# EAGLE board PCB_v21 (EAGLE 9.6.2)
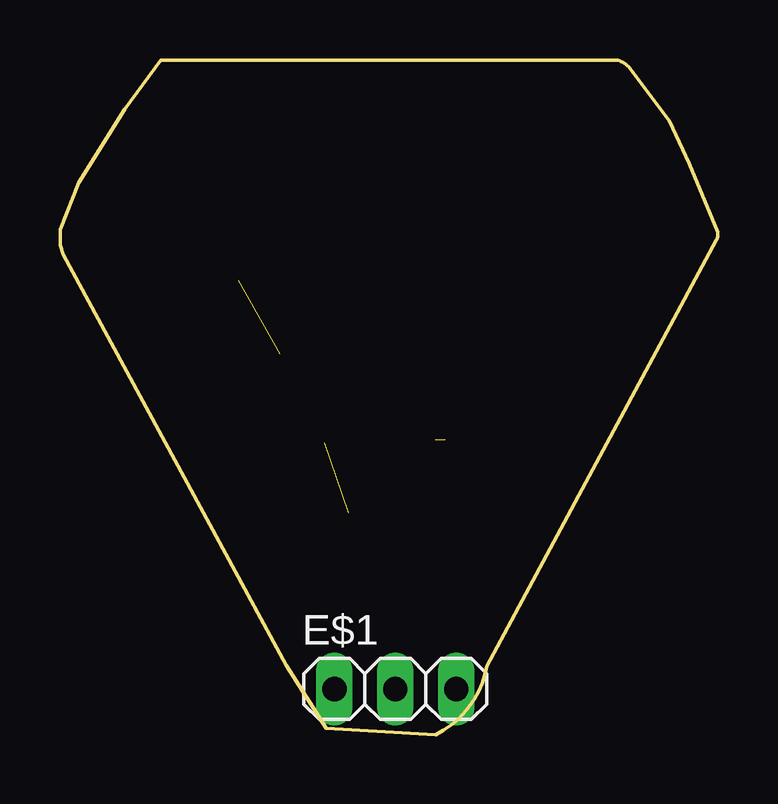
[diagram p0: board, top side]
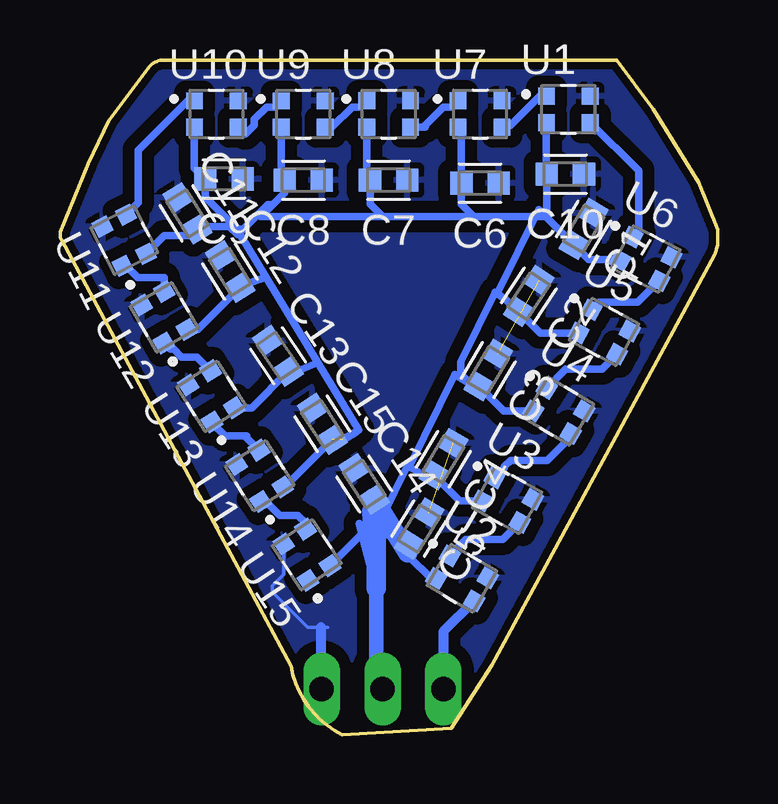
[diagram p1: board, bottom side, seen from below]

Size 27.41 x 28.13 mm. Coordinates in mm from the lower left corner, seen from the top.
Outline: 27.34,20.61 arc42 27.4,20.95 26.23,23.81 25.38,25.59 23.74,27.78 arc39 23.24,28.11 4.2,28.13 2.69,26.07 0.78,23 0,21.06 0,20.41 0.13,20.01 9.43,2.89 11.1,0.25 15.66,0 arc53 17.78,2.84 27.34,20.61
Copper layers (1*16): Top 0.035mm / dielectric 1.5mm / Bottom 0.035mm
Design rules "default *": minimum track width 6mil, minimum drill 0.35mm, track to track 20mil, track to pad 12mil, pad to pad 6mil, via to via 6mil, smd to smd 6mil, copper to edge 12mil, drill to drill 6mil, minimum pad ring 10mil, minimum via ring 8mil, stop-mask expansion 4mil, vias tented up to drill 0mil, thermal gap 10mil

## Footprints (pad centres in the part's own frame; a part is rotated, then mirrored left to right if it is on the bottom)
CAPC1608X85 = smd 0.921 x 0.97: 1 -0.775,0; 2 0.775,0
1X03 = drill 1.016 long: 1 -2.54,0; 2 0,0; 3 2.54,0
LED_WS2812-2020 = smd 0.7 x 0.7: 1 -0.915,0.55; 2 -0.915,-0.55; 3 0.915,-0.55; 4 0.915,0.55

## Placement (x,y rotation side)
C1  [CAPC1608X85]  5.59,21.08 239.1 bottom
C2  [CAPC1608X85]  7.87,18.29 236.7 bottom
C3  [CAPC1608X85]  9.56,15.2 239.2 bottom
C4  [CAPC1608X85]  11.43,11.48 239.1 bottom
C5  [CAPC1608X85]  12.45,8.58 238.4 bottom
C6  [CAPC1608X85]  9.91,22.99 180 bottom
C7  [CAPC1608X85]  13.72,23.11 180 bottom
C8  [CAPC1608X85]  17.27,23.11 180 bottom
C9  [CAPC1608X85]  20.57,23.17 180 bottom
C10  [CAPC1608X85]  6.35,23.37 180 bottom
C11  [CAPC1608X85]  22.1,21.73 301.5 bottom
C12  [CAPC1608X85]  20.32,19.3 301.9 bottom
C13  [CAPC1608X85]  18.32,15.79 304.1 bottom
C14  [CAPC1608X85]  14.73,10.45 303.3 bottom
C15  [CAPC1608X85]  16.48,12.95 302.8 bottom
E$1  [1X03]  13.97,1.9 0 top
U1  WS2812-2020  [LED_WS2812-2020]  6.23,26.07 0 bottom
U2  WS2812-2020  [LED_WS2812-2020]  10.66,6.52 329.5 bottom
U3  WS2812-2020  [LED_WS2812-2020]  8.78,9.78 330.8 bottom
U4  WS2812-2020  [LED_WS2812-2020]  6.63,13.49 329.2 bottom
U5  WS2812-2020  [LED_WS2812-2020]  4.74,16.78 331.2 bottom
U6  WS2812-2020  [LED_WS2812-2020]  3,19.83 332.5 bottom
U7  WS2812-2020  [LED_WS2812-2020]  9.91,25.88 0 bottom
U8  WS2812-2020  [LED_WS2812-2020]  13.72,25.87 0 bottom
U9  WS2812-2020  [LED_WS2812-2020]  17.27,25.87 0 bottom
U10  WS2812-2020  [LED_WS2812-2020]  20.89,25.87 0 bottom
U11  WS2812-2020  [LED_WS2812-2020]  24.73,20.61 117 bottom
U12  WS2812-2020  [LED_WS2812-2020]  23.07,17.4 120.4 bottom
U13  WS2812-2020  [LED_WS2812-2020]  21.11,14.1 122.6 bottom
U14  WS2812-2020  [LED_WS2812-2020]  19.09,10.79 122.8 bottom
U15  WS2812-2020  [LED_WS2812-2020]  17.12,7.5 123.7 bottom

## Library data of the parts
C1-C15 = Capacitor; CATEGORY: Capacitor
E$1 = pinhead
U1-U3 U5-U15 = WS2812-2020; MANUFACTURER: Worldsemi; STANDARD: Manufacturer Recommendations
U4 = WS2812-2020; MANUFACTURER: Worldsemi; SPICEPREFIX: E; STANDARD: Manufacturer Recommendations

## Nets
GND: C1.2 C2.2 C3.2 C4.2 C5.2 C6.2 C7.2 C8.2 C9.2 C10.2 C11.2 C12.2 C13.2 C14.2 C15.2 U1.2 U2.2 U3.2 U4.2 U5.2 U6.2 U7.2 U8.2 U9.2 U10.2 U11.2 U12.2 U13.2 U14.2 U15.2
N$1: U2.1 U3.3
N$2: U3.1 U4.3
N$3: U4.1 U5.3
N$4: U5.1 U6.3
N$5: U2.3
N$6: U1.1 U7.3
N$11: U7.1 U8.3
N$12: U8.1 U9.3
N$13: U9.1 U10.3
N$14: U1.3 U6.1
N$15: U11.1 U12.3
N$16: U12.1 U13.3
N$17: U13.1 U14.3
N$18: U14.1 U15.3
N$19: U10.1 U11.3
VCC: C1.1 C2.1 C3.1 C4.1 C5.1 C6.1 C7.1 C8.1 C9.1 C10.1 C11.1 C12.1 C13.1 C14.1 C15.1 U1.4 U2.4 U3.4 U4.4 U5.4 U6.4 U7.4 U8.4 U9.4 U10.4 U11.4 U12.4 U13.4 U14.4 U15.4

## Tracks (layer width: path | path; a pad name or v marks a point on that pad's centre or on a via)
GND  (1 unrouted)
  Bottom 0.305: U5.2 7.4,16.74 C2.2 8.41,17.72 8.81,18.12 | C3.2 8.92,13.49 U4.2 | U3.2 10.75,9.74 C4.2 11.93,10.88 12.35,10.88 | C5.2 12.85,7.42 11.94,6.51 U2.2 | U6.2 4.11,19.81 5.38,19.81 C1.2 7.12,21.56 | 7.12,21.59 C10.2 7.14,23.38 U1.2 | 7.12,21.59 7.12,21.56 | 7.12,21.56 7.47,21.9 9.18,18.39 8.81,18.12 | 14.35,9.87 14.35,8.6 14.77,8.17 | U15.2 14.83,8.37 14.77,8.17 | U14.2 18.04,10.32 C15.2 15.81,12.15 15.09,12.59 | U13.2 19.41,13.63 C13.2 17.88,15.12 17.61,15.23 17.35,15.23 | U12.2 21.67,16.88 C12.2 19.81,18.75 19.46,18.86 19.12,18.96 18.9,19.03 18.82,19.06 | 21.69,21.18 22.07,20.81 23.06,20.81 U11.2 | U10.2 21.81,23.62 C9.2 21.35,22.41 20.02,21.08 19.76,21.08 | U9.2 18.19,23.25 C8.2 18.05,22.59 18.54,22.1 | U8.2 14.63,23.25 C7.2 14.49,22.11 13.97,21.59 | U7.2 10.68,25.18 C6.2 10.68,22.11 10.16,21.59 | 7.12,21.59 10.16,21.59 | 10.16,21.59 13.97,21.59 | 13.97,21.59 19.05,21.59 18.54,22.1 | 18.54,22.1 18.75,22.1 19.76,21.08 | 19.76,21.08 19.94,20.9 | 19.94,20.9 20,20.84 20.35,21.18 21.69,21.18 | 19.94,20.9 18.82,19.06 | 18.82,19.06 16.67,15.52 | 16.67,15.52 14.96,12.7 15.63,12.3 | C3.2 10.21,14.53 10.71,15.03 10.71,15.53 9.28,18.45 8.81,18.12 | C3.2 10.29,14.72 10.47,14.72 10.96,15 12.85,11.15 12.35,10.88 | 12.35,10.88 12.95,11.2 13.99,9.07 14.53,8.43 | 14.41,9.31 C5.2 | 14.22,8.15 14.35,8.27 14.53,8.43 | 16.67,15.52 17.35,15.23 | 16.67,15.52 17.35,15.23 | C5.2 12.71,7.78 12.91,7.58 | 14.29,6.33 14.22,6.1 | 14.29,6.33 14.68,7.82 | 14.68,7.82 14.94,8.8 C5.2 | 14.68,7.82 14.77,8.17 | 14.35,9.87 14.29,9.81 14.29,6.33 | C11.2 21.69,21.18 | 14.35,9.87 14.53,9.69 14.53,8.43
  Bottom 0.61: 14.22,6.1 14.22,2.16
  Bottom 0.813: 14.22,8.15 14.22,6.1 | 14.35,8.27 14.41,9.31 | 12.91,7.58 14.35,9.87 C14.2
N$1
  Bottom 0.305: U2.1 10.49,8.13 8.97,8.13 U3.3
N$2
  Bottom 0.305: U3.1 8.89,11.12 8.89,11.18 8.64,11.43 7.11,11.43 6.12,12.42 U4.3
N$3
  Bottom 0.305: U4.1 6.33,15.24 4.82,15.24 U5.3
N$4
  Bottom 0.305: U5.1 4.95,18.03 3.33,18.03 U6.3
N$5
  Bottom 0.406: U2.3 11.43,4.3 11.43,1.91
N$6
  Bottom 0.305: U7.3 8.93,25.39 8.65,25.39 7.42,26.62 U1.1
N$11
  Bottom 0.305: U7.1 11.08,26.16 11.43,26.16 12.19,25.4 12.19,25.32 U8.3
N$12
  Bottom 0.305: U8.1 14.89,26.16 15.24,26.16 16.08,25.32 U9.3
N$13
  Bottom 0.305: U9.1 18.45,26.16 18.8,26.16 19.3,25.65 19.3,25.4 19.68,25.02 U10.3
N$14
  Bottom 0.305: U1.3 3.3,23.51 3.3,21 U6.1
N$15
  Bottom 0.305: U12.3 23.06,19.05 24.17,19.05 24.66,19.55 U11.1
N$16
  Bottom 0.305: U12.1 22.82,16.07 22.68,16.07 22.35,15.75 21.72,15.75 U13.3
N$17
  Bottom 0.305: U14.3 19.63,12.37 19.63,12.45 20.53,12.45 21.08,13 U13.1
N$18
  Bottom 0.305: U15.3 17.17,8.82 17.5,9.14 18.25,9.14 18.83,9.72 U14.1
N$19
  Bottom 0.305: U11.3 24.14,22.18 24.14,24.37 22.03,26.48 21.87,26.48 U10.1
VCC  (2 unrouted)
  Bottom 0.152: U15.4 18.09,6.68 18.57,6.2 18.57,5.94 17.09,4.47 16.54,4.47 16.26,4.47
  Bottom 0.406: 16.54,4.47 16.54,1.96 16.48,1.91
  pour Bottom: 0.13,20.01 0,20.41 0,21.06 0.78,23 2.7,26.07 4.2,28.13 23.24,28.11 arc-39 23.74,27.78 25.38,25.59 26.23,23.81 27.4,20.94 arc-42 27.34,20.61 17.78,2.84 arc-53 15.66,0 11.1,0.25 9.43,2.89